# Altium PCB EmitterControllerV2.PcbDoc
Units mm, origin at the board's own origin, x right, y up, seen from the top; angles counter-clockwise.
Board outline 28.75 x 21.25 mm, 4 copper layers (Component Side, Ground Plane, Power Plane, Solder Side), stack 0.844 mm thick; 39 components, 31 nets, 138 pads, 49 vias.
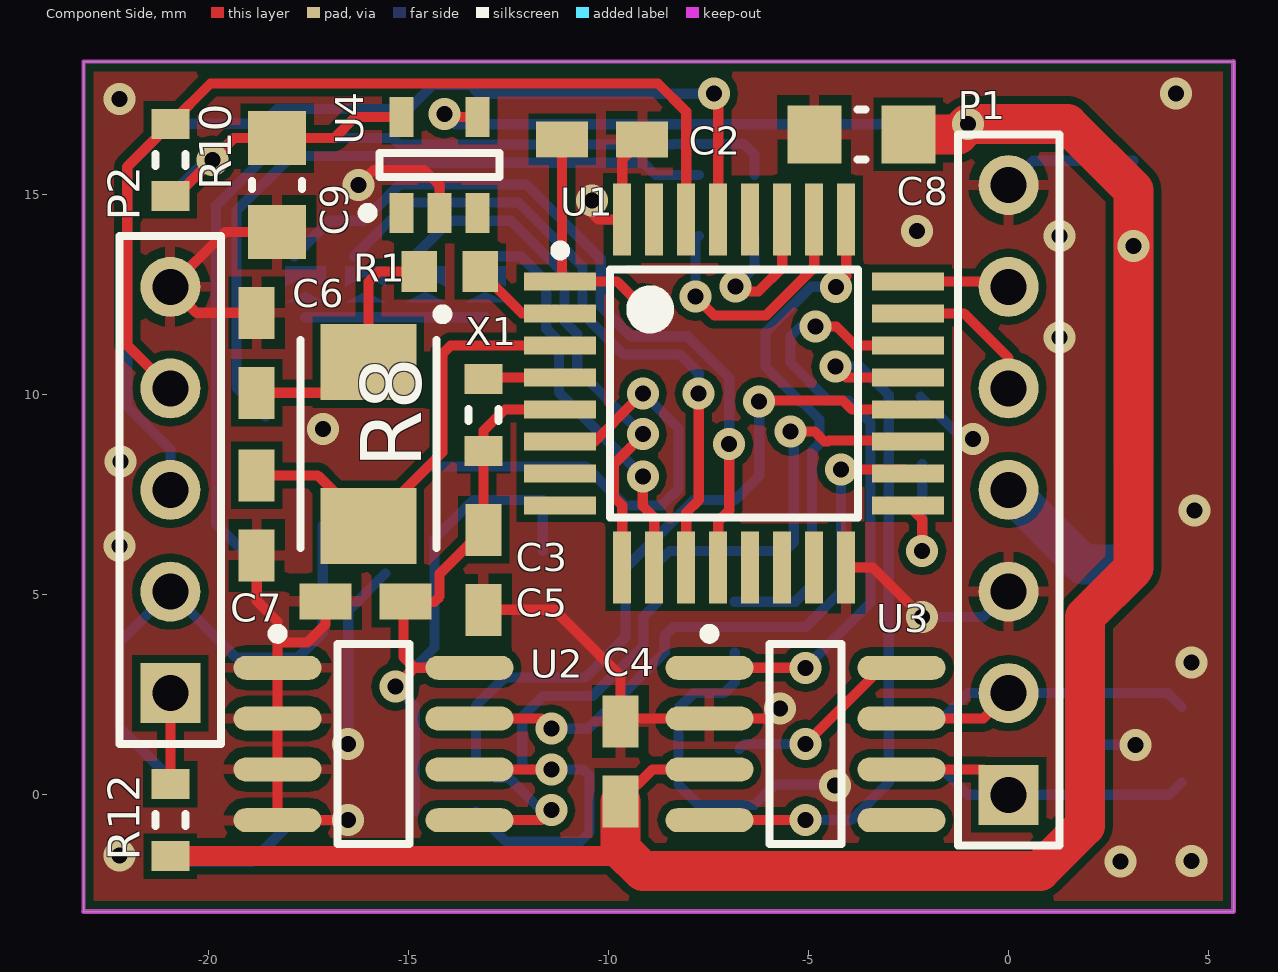
[diagram p0: Component Side view]
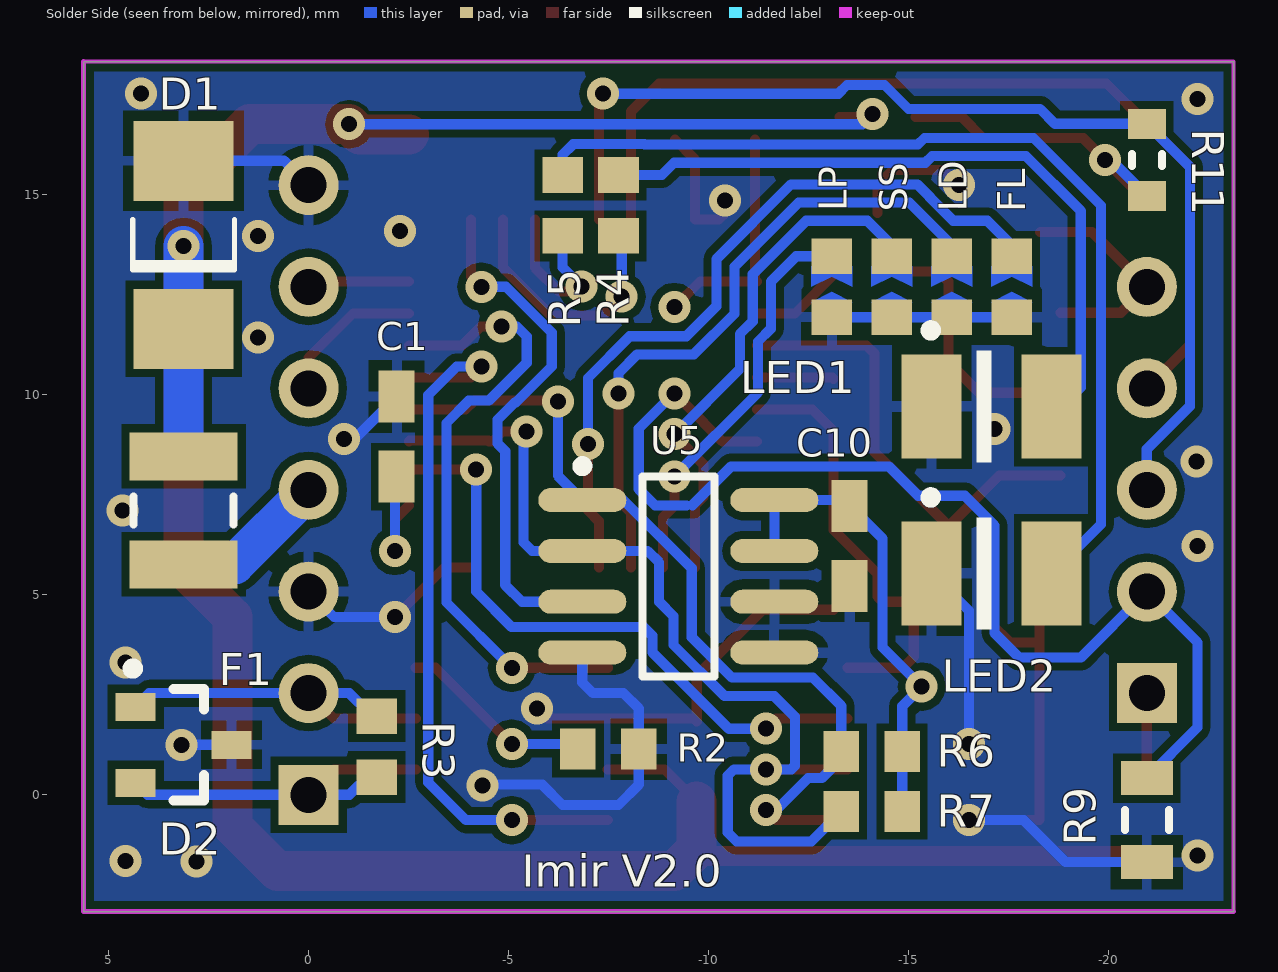
[diagram p1: Solder Side view, seen from below]
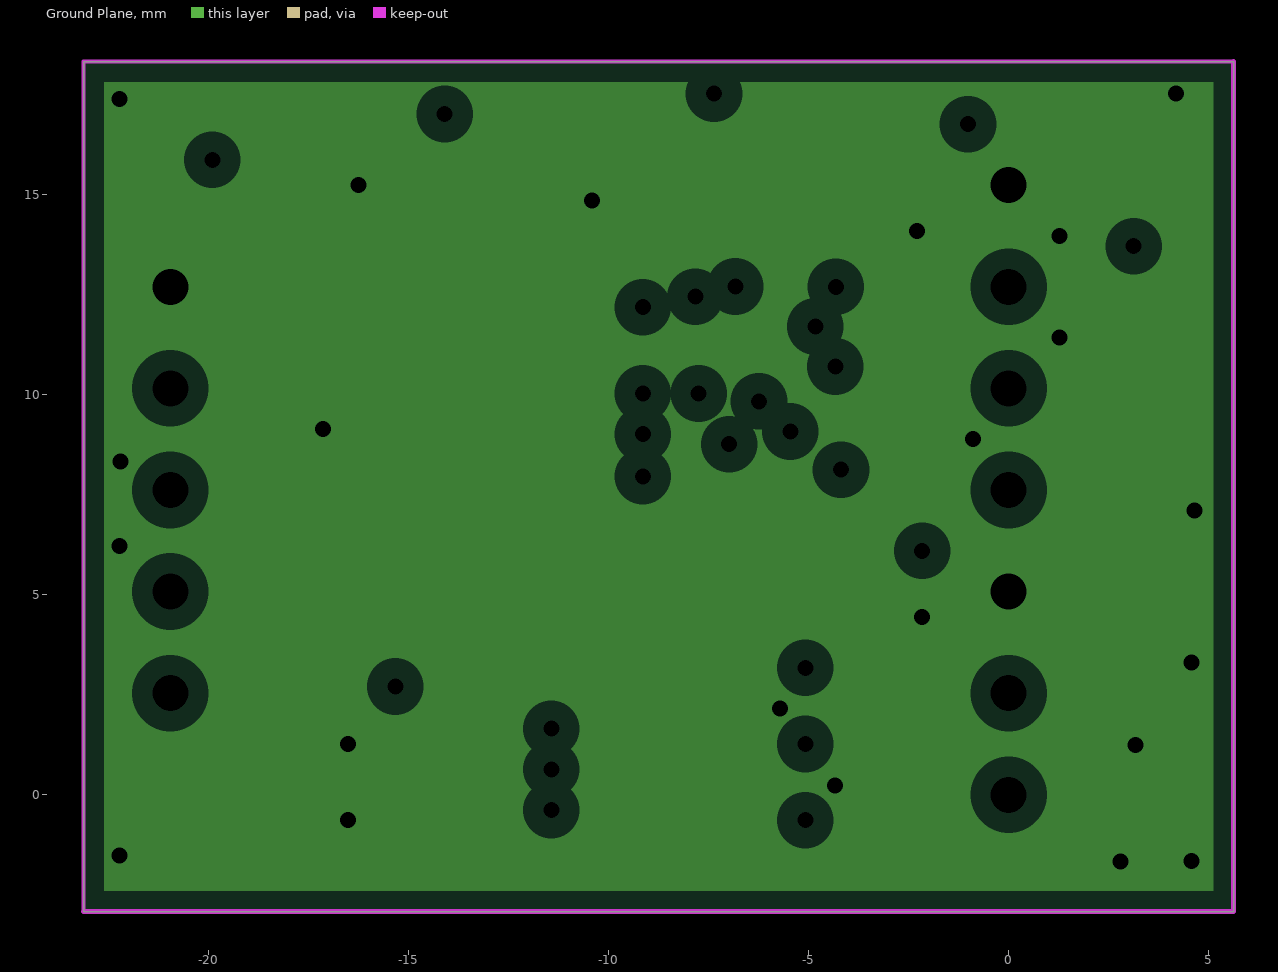
[diagram p2: Ground Plane, clearances drawn from the general rule]
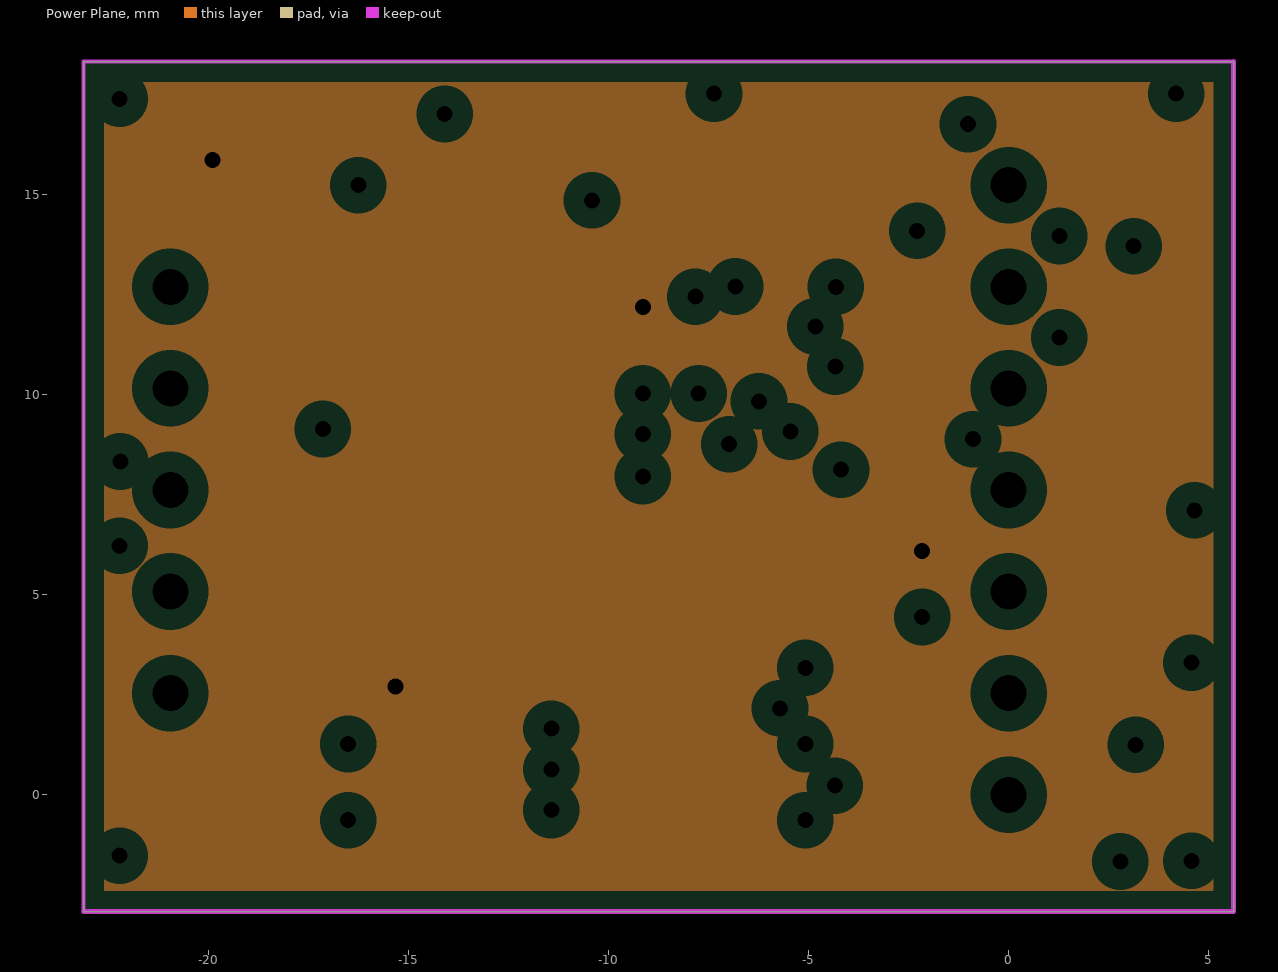
[diagram p3: Power Plane, clearances drawn from the general rule]
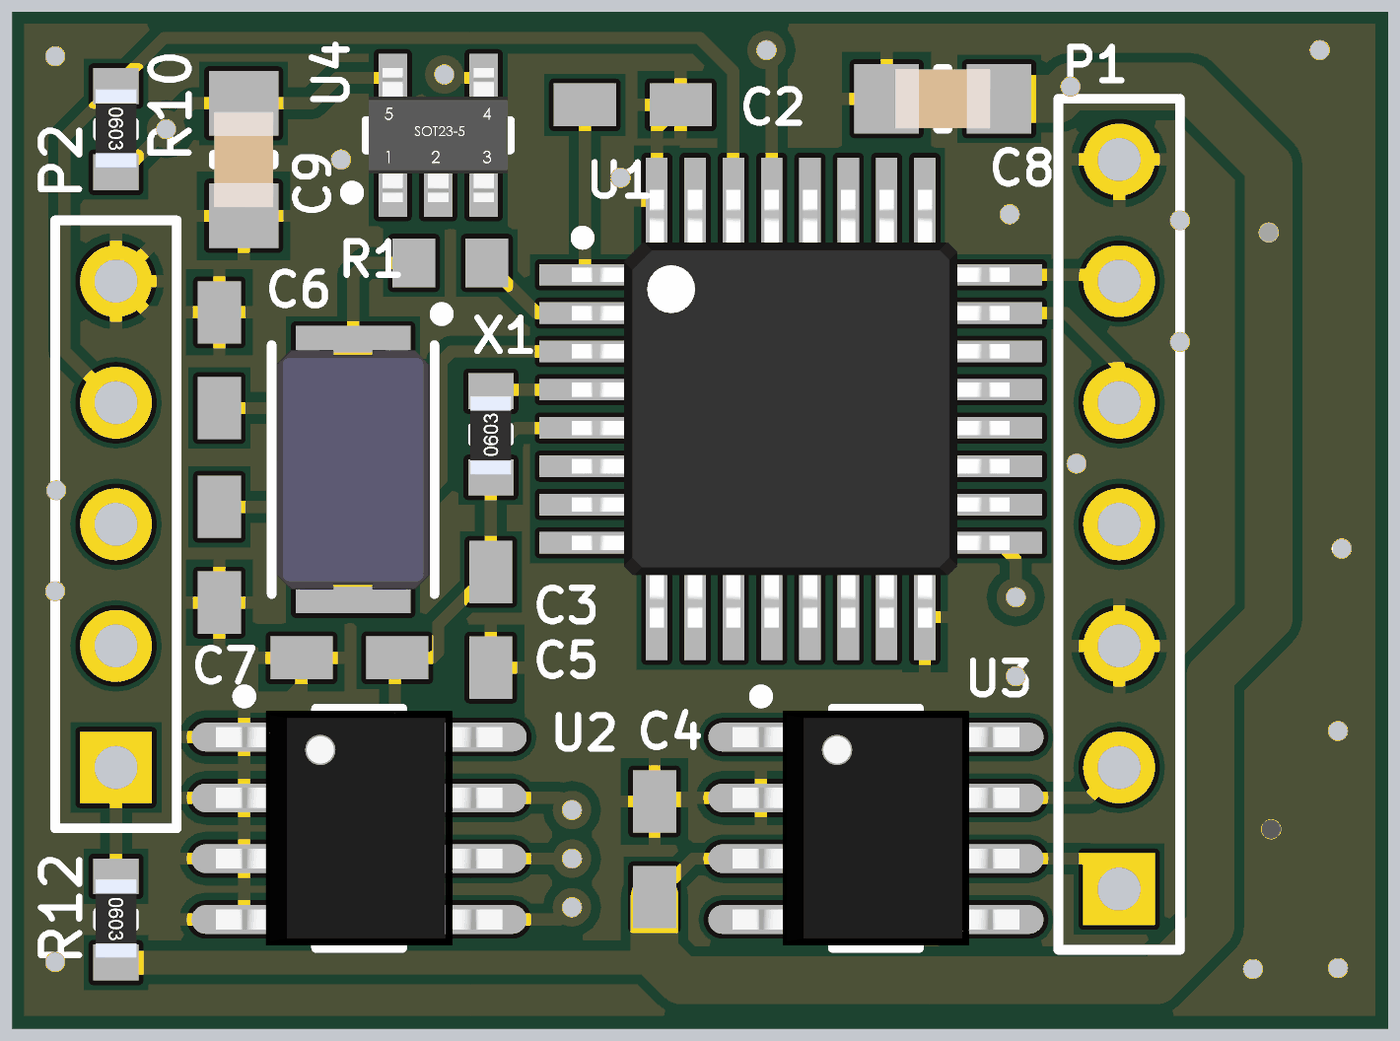
[diagram p4: 3D render of the assembled board from above, using the file's embedded part models]

## Layer stack, top to bottom
Top Solder: solder mask 0.0102, Solder Resist, Dk 3.5
Component Side: signal copper 0.0356
Dielectric 1: core 0.32, FR-4, Dk 4.8
Ground Plane: plane copper 0.036, net GND
Dielectric 3: prepreg 0.127, Dk 4.2
Power Plane: plane copper 0.036, net VCC
Dielectric 4: core 0.254, Dk 4.2
Solder Side: signal copper 0.0356
Bottom Solder: solder mask 0.0102, Solder Resist, Dk 3.5

## Board outline
-23.125,-2.92 5.625,-2.92 5.625,18.33 -23.125,18.33

## Design rules (kind name [scope] priority, off if disabled: settings)
Clearance [All] p1: gap=0.2
MinimumSolderMaskSliver [All] p1: minsoldermaskwidth=0.1
PlaneClearance [All] p1: clearance=0.508
PlaneConnect PlaneConnect_VCC [InNet('VCC') AND IsVia] p1: planeconnectstyle=Direct reliefexpansion=0.508 reliefentries=4 reliefconductorwidth=0.254 reliefairgap=0.254
PlaneConnect PlaneConnect_GND [InNet('GND') AND IsVia] p2: planeconnectstyle=Direct reliefexpansion=0.508 reliefentries=4 reliefconductorwidth=0.254 reliefairgap=0.254
PlaneConnect [All] p3: planeconnectstyle=Relief reliefexpansion=0.508 reliefentries=4 reliefconductorwidth=0.254 reliefairgap=0.254
PolygonConnect PolygonDirectConnectVia [All vs IsVia] p1: connectstyle=Direct reliefconductorwidth=0.254 reliefentries=4 polygonreliefangle="90 Angle" airgapwidth=0.254
PolygonConnect [All] p2: connectstyle=Relief reliefconductorwidth=0.254 reliefentries=4 polygonreliefangle="90 Angle" airgapwidth=0.254
RoomDefinition LaserLEDController [InComponentClass('LaserLEDController')] p1: confinementstyle=ConfineIn formatcopy=TRUE lockcomponents=FALSE outline -23.125,-2.92 5.625,-2.92 5.625,18.33 -23.125,18.33
RoutingVias [All] p1: holewidth=0.711 width=1.27 viastyle="Through Hole" minholewidth=0.4 minwidth=0.8 maxholewidth=0.711 maxwidth=1.27
SilkToSolderMaskClearance [IsPad] p1: minsilkscreentomaskgap=0 clearancetoexposedcopper=TRUE
SolderMaskExpansion [All] p1: expansion=0.102
Width [All] p1: maxlimit=1 minlimit=0.254 preferedwidth=0.254
26 further rules are at their usual default settings.

## Components (designator, comment, footprint, x,y, rotation, side; value= is the part's Value field where it differs from the comment)
C1 "ChipCap" CAP0603 -2.204,8.955 r270 bottom
C2 "ChipCap" CAP0603 -10.16,16.383 r180 top
C3 "ChipCap" CAP0603 -13.125,5.625 r90 top
C4 "ChipCap" CAP0603 -9.704,0.83 r90 top
C5 "ChipCap" CAP0603 -16.079,4.83 r0 top
C6 "ChipCap" CAP0603 -18.796,11.049 r270 top
C7 "ChipCap" CAP0603 -18.796,6.985 r90 top
C8 "ChipCap" CAP0805 -3.683,16.51 r0 top
C9 "ChipCap" CAP0805 -18.288,15.24 r90 top
C10 "ChipCap" CAP0603 -13.527,6.223 r90 bottom
D1 "SMBJ5.0CA" DO-214AS 3.125,13.75 r90 bottom
D2 "PESD5V0" SOT23 3.125,1.25 r180 bottom
F1 "Fuse" PTC1210 3.125,7.112 r270 bottom
FL "Jumper" J0603 -17.581,12.7 r90 bottom
LD "Jumper" J0603 -16.081,12.7 r90 bottom
LED1 "LED 0603" PLCC-2 -17.079,9.705 r180 bottom
LED2 "LED 0603" PLCC-2 -17.079,5.53 r180 bottom
LP "Jumper" J0603 -13.081,12.7 r90 bottom
P1 "Header 7" HDR1X7 0,0 r90 top
P2 "Header 5" HDR1X5 -20.955,2.54 r90 top
R1 "ChipRes" RES0603#1 -13.97,13.081 r180 top
R2 "ChipRes" RES0603#1 -7.493,1.143 r0 bottom
R3 "ChipRes" RES0603#1 -1.704,1.205 r270 bottom
R4 "ChipRes" RES0603#1 -7.747,14.732 r270 bottom
R5 "ChipRes" RES0603#1 -6.35,14.732 r270 bottom
R6 "ChipRes" RES0603#1 -14.079,1.08 r0 bottom
R7 "ChipRes" RES0603#1 -14.079,-0.42 r0 bottom
R8 "ChipRes" RES0603#2 -13.125,9.5 r90 top
R9 "RES0805 510R 1%" RES0805 -20.955,-0.635 r90 bottom
R10 "ChipRes" RES0603#2 -20.955,15.875 r270 top
R11 "ChipRes" RES0603#2 -20.955,15.875 r270 bottom
R12 "ChipRes" RES0603#2 -20.955,-0.635 r270 top
SS "Jumper" J0603 -14.581,12.7 r90 bottom
U1 "STM32F042K6T6" LQFP32 -6.858,10.033 r0 top
U2 "M24256" SOIC8 -15.875,1.27 r0 top
U3 "MCP2551" SOIC8 -5.08,1.27 r0 top
U4 "ST715M33R" SOT23-5 -14.224,15.748 r90 top
U5 "DS1631" SOIC8 -9.244,5.461 r180 bottom
X1 "XTAL" "ABM3 CERAMIC CRYSTAL" -16.002,8.763 r270 top

## Footprints (in the part's own frame and the unit in brackets; to place one, negate y for a bottom-side part, rotate by r counter-clockwise, add the part's x,y. Pads: shape width x height; smd on the part's side, far side on the other; paste and mask are expansions set on the pad)
"ABM3 CERAMIC CRYSTAL" [mm]
  rect 1.9x2.4 smd: 1(-2.05,0) 2(2.05,0)
  silkscreen extent -3.37,-1.7 2.6,1.97, body extent -2.5,-1.6 2.5,1.6, height 1.3
CAP0603 [mm]
  rect 1.3x0.9 smd: 1(-1,0) 2(1,0)
  body extent -1.15,-0.4 1.15,0.4, height 0.55
CAP0805 [mm]
  rect 1.35x1.45 smd: 1(-1.175,0) 2(1.175,0)
  silkscreen extent -0.1,-0.63 0.1,0.63, body extent -1,-0.62 1,0.63, height 0.3
DO-214AS [mm]
  rect 2x2.5 smd: 1(-2.1,0) 2(2.1,0)
  silkscreen extent -0.64,-1.27 0.64,1.27, body extent -2.74,-1.4 2.74,1.4, height 2.3
HDR1X5 [mm] "Connector; Header; 5 Position"
  rect 1.5x1.5 hole 0.9: 1(0,0)
  round 1.5 hole 0.9: 2(2.54,0) 3(5.08,0) 4(7.62,0) 5(10.16,0)
  silkscreen extent -1.27,-1.27 11.43,1.27
HDR1X7 [mm] "Connector; Header; 7 Position"
  rect 1.5x1.5 hole 0.9: 1(0,0)
  round 1.5 hole 0.9: 2(2.54,0) 3(5.08,0) 4(7.62,0) 5(10.16,0) 6(12.7,0) 7(15.24,0)
  silkscreen extent -1.27,-1.27 16.51,1.27
J0603 [mil]
  rect 35x40 smd: 1(-30,0) 2(30,0)
  Component Side region: 0,20 10,0 0,-20 20,-20 20,20
  Component Side region: -15,-20 -15,20 -5,0
LQFP32 [mm] "LQFP, 32-Leads, Body 7.00x7.00mm, Pitch 0.80mm, IPC Medium Density"
  rect 1.8x0.45 smd: 1(-4.35,2.8) 2(-4.35,2) 3(-4.35,1.2) 4(-4.35,0.4) 5(-4.35,-0.4) 6(-4.35,-1.2) 7(-4.35,-2) 8(-4.35,-2.8) 17(4.35,-2.8) 18(4.35,-2) 19(4.35,-1.2) 20(4.35,-0.4) 21(4.35,0.4) 22(4.35,1.2) 23(4.35,2) 24(4.35,2.8)
  rect 0.45x1.8 smd: 9(-2.8,-4.35) 10(-2,-4.35) 11(-1.2,-4.35) 12(-0.4,-4.35) 13(0.4,-4.35) 14(1.2,-4.35) 15(2,-4.35) 16(2.8,-4.35) 25(2.8,4.35) 26(2,4.35) 27(1.2,4.35) 28(0.4,4.35) 29(-0.4,4.35) 30(-1.2,4.35) 31(-2,4.35) 32(-2.8,4.35)
  silkscreen extent -4.47,-3.1 3.1,3.7, body extent -4.57,-4.57 4.57,4.57, height 1.62
PLCC-2 [mm]
  rect 1.5x2.6 smd: 1(-1.5,0) 2(1.5,0)
  silkscreen extent -1.65,-1.4 0,2.03, body extent -1.75,-1.4 1.75,1.4, height 1.91
PTC1210 [mm]
  rect 1.2x2.7 smd: 1(-1.35,0) 2(1.35,0)
  silkscreen extent -0.35,-1.25 0.35,1.25, body extent -1.6,-1.35 1.6,1.35, height 0.55
RES0603#1 [mil]
  rect 35x40 smd: 1(-30,0) 2(30,0)
RES0603#2 [mil] "Chip Resistor, 2-Leads, Body 1.60x0.85mm, IPC Medium Density"
  rect 29.53x37.4 smd: 1(-35.43,0) 2(35.43,0)
  silkscreen extent -6,-15 6,15, body extent -33,-17 31,17, height 18
RES0805 [mm] "Chip Resistor, 2-Leads, Body 2.00x1.27mm, IPC Medium Density"
  rect 0.85x1.3 smd: 1(-1.05,0) 2(1.05,0)
  silkscreen extent -0.25,-0.55 0.25,0.55, body extent -1.15,-0.67 1.15,0.68, height 0.76
SOIC8 [mm] "SOIC, 8-Leads, Body 4,90x3,90mm, Pitch 1,27mm, IPC Medium Density"
  oval 2.2x0.6 smd: 1(-2.4,1.905) 2(-2.4,0.635) 3(-2.4,-0.635) 4(-2.4,-1.905) 5(2.4,-1.905) 6(2.4,-0.635) 7(2.4,0.635) 8(2.4,1.905)
  silkscreen extent -2.52,-2.5 0.9,2.88, body extent -3,-2.45 3,2.45, height 1.61
SOT23 [mm]
  rect 1x0.7 smd: 1(-1.2,0.95) 2(-1.2,-0.95) 3(1.2,0)
  silkscreen extent -1.4,-1.4 0.51,2.03, body extent -1.25,-1.5 1.25,1.5, height 1.09
SOT23-5 [mm] "SOT23, 5-Leads, Body 2.90x2.45mm, Pitch 0.95mm, IPC Medium Density"
  rect 1x0.6 smd: 1(-1.2,0.95) 2(-1.2,0) 3(-1.2,-0.95) 4(1.2,-0.95) 5(1.2,0.95)
  silkscreen extent -1.32,-1.5 0.3,1.92, body extent -1.4,-1.45 1.4,1.45, height 1.24

## Part data
C1 C2 C3 C4 C5 C6 C7 C8 C9 C10: "Capacitor"
D1: "Transient Voltage Suppressor 600W uni-directional"
D2: "Low capacitance bidirectional double ESD protection diode"
F1: library part "Fuse PTC1812", "Fuse PTC 1812 Thermoresistor"
LED1 LED2: library part LED0603
P1: "Header, 7-Pin"
P2: "Header, 5-Pin"
R1 R2 R3 R4 R5 R6 R7 R8 R10 R11 R12: "Chip resistor"
R9: "Think Film Chip resistor"
U1: "ARM Cortex-M0 Microcontroller"
U2: "256 Kbit I2C EEPROM"
U3: library part MCP2551-I/SN, "CAN Transceiver"
U4: "High input voltage - 85 mA LDO linear regulator"
U5: "High-Precision Digital  Thermometer and Thermostat"
X1: library part "ABM3 Ceramic SMD Crystal", "Quartz crystall oscillator"

## Via types
v1: diameter 0.8, hole 0.4, Component Side to Solder Side, tented both sides, 49 vias

## Nets (pads, with @x,y where several pads share a name; then routed paths per layer and width w, separated by ;. In a path a pad name is that pad's centre, name@x,y a point inside that pad or via, vN(x,y) a via of type N, cw(c..) or ccw(c..) an arc to the next point about the centre after c; other vN are vias at no path point)
5V: C4.1 C8.2 D1.1 F1.1 R12.2 U3.3 U4.4 | length 69.6
  Component Side w0.254: v1@-13.9,16.948 U4.4 ; C4.1 -8.899,0.635 U3.3 ; C8.2@-2.889,16.51 C8.2
  Component Side w0.5: R12.2 -9.894,-1.535 -9.704,-1.345
  Component Side w1: C4.1 -9.704,-1.345 -9.144,-1.905 0.781,-1.905 1.905,-0.781 1.905,4.445 3.125,5.665 v1(3.125,13.716) 3.125,15.113 1.474,16.764 v1(-1.016,16.764) -1.27,16.51 C8.2
  Solder Side w0.254: v1(-14.097,17.018) -13.843,16.764 v1(-1.016,16.764)
  Solder Side w1: F1.1 D1.1 v1(3.125,13.716)
AIN0: P2.2 R9.2 U1.6 | length 28.4
  Component Side w0.254: U1.6 -10.344,8.833 -9.871,9.306 -9.871,9.318 -9.156,10.033 v1(-9.144,10.033)
  Solder Side w0.254: R9.2 -22.225,1.685 -22.225,3.81 P2.2 -19.304,3.429 -17.767,3.429 -17.145,4.051 -17.145,6.734 -16.404,7.475 -15.24,7.475 -14.504,8.211 -10.568,8.211 -9.596,7.239 ; -9.445,7.234 -8.663,7.234 -8.255,7.642 -8.255,9.156 -9.132,10.033 v1(-9.144,10.033)
CAN_RX: U1.21 U3.4 | length 18.1
  Component Side w0.254: U3.4 v1(-5.08,-0.635) ; v1(-4.329,10.705) -4.056,10.433 U1.21
  Solder Side w0.254: v1(-5.08,-0.635) -3.937,-0.635 -2.994,0.308 -2.994,9.995 -3.704,10.705 v1(-4.329,10.705)
CAN_TX: U1.22 U3.1 | length 15.7
  Component Side w0.254: U3.1 v1(-5.08,3.175) ; v1(-4.829,11.705) -4.301,11.705 -3.828,11.233 U1.22
  Solder Side w0.254: v1(-5.08,3.175) -3.448,4.807 -3.448,9.295 -4.006,9.853 -4.505,9.853 -5.454,10.802 -5.454,11.455 -5.204,11.705 v1(-4.829,11.705)
CANH: D2.1 P1.2 R3.1 U3.7 | length 9.1
  Component Side w0.254: U3.7 -0.635,1.905 P1.2
  Solder Side w0.254: R3.1@-1.524,2.032 -1.016,2.54 P1.2 3.985,2.54 D2.1
CANL: D2.2 P1.1 R3.2 U3.6 | length 9.1
  Component Side w0.254: U3.6 -0.635,0.635 P1.1
  Solder Side w0.254: R3.2@-1.524,0.508 -1.016,0 P1.1 4.025,0 D2.2
GND: C1.1 C2.1 C3.1 C4.2 C5.1 C6.1 C7.1 C8.1 C9.1 C10.1 D1.2 D2.3 FL.1 LD.1 LED1.1 LED2.1 LP.1 P1.3 P1.7 P2.5 R2.1 R9.1 SS.1 U1.16 U1.32 U2.1 U2.2 U2.3 U2.4 U3.2 U4.2 U5.4 U5.5 U5.6 | length 65.9
  Component Side w0.254: C7.1 -18.796,4.852 -18.275,4.331 -18.275,3.81 ; C6.1 -20.304,12.049 P2.5 -19.59,14.065 C9.1 ; C5.1 -17.079,4.257 -17.526,3.81 -18.275,3.81 ; v1(-16.51,-0.635) U2.4 U2.3 U2.2 U2.1 -18.275,3.81 ; v1(-16.256,15.24) -15.875,15.621 -14.605,15.621 -14.224,15.24 U4.2 ; C3.1 -11.356,4.625 -9.704,2.973 C4.2 -9.629,1.905 U3.2 -5.969,1.905 v1(-5.715,2.159) ; v1(-10.414,14.859) -10.414,14.542 -10.255,14.383 U1.32 -9.658,15.885 C2.1 ; v1(-4.345,0.227) v1@-4.318,0.254 ; U1.16 -3.397,5.683 v1(-2.159,4.445)
  Solder Side w0.254: R9.1 -18.931,-1.685 -17.881,-0.635 v1(-16.51,-0.635) ; FL.1 LD.1 SS.1 LP.1 ; v1(-16.51,1.27) -16.51,4.599 LED2.1 ; U5.4 -6.844,2.808 -7.112,2.54 -7.874,2.54 -8.255,2.159 R2.1 -8.255,0.254 -7.747,-0.254 -6.35,-0.254 -5.842,0.254 -4.372,0.254 v1(-4.345,0.227) ; C1.1 -1.139,8.89 v1(-0.889,8.89) ; v1(-2.159,4.445) -0.635,4.445 P1.3 ; P1.7 0.61,15.85 D1.2 ; D2.3 v1(3.175,1.25)
  other v1: 2.796,-1.67 4.572,-1.651 -22.225,-1.524 4.572,3.302 -22.225,6.223 4.649,7.112 -22.204,8.33 -17.145,9.144 1.27,11.43 1.27,13.97 -2.286,14.097 -22.225,17.399 4.191,17.526
I2C1_SCL: R7.2 U1.19 U2.6 U5.2 | length 25.2
  Component Side w0.254: U2.6 v1(-11.43,0.635) ; v1(-5.454,9.08) -4.85,9.08 -4.602,8.833 -4.514,8.833 -4.492,8.855 -2.53,8.855 U1.19
  Solder Side w0.254: R7.2 -12.567,-1.17 -10.704,-1.17 -10.479,-0.945 -10.479,0.48 -10.634,0.635 v1(-11.43,0.635) -12.065,0.635 -12.157,0.727 -12.157,1.952 -11.642,2.467 -10.404,2.467 -9.125,3.746 -9.125,4.464 -8.763,4.826 -8.763,5.81 -8.477,6.096 U5.2 -5.588,6.096 -5.372,6.312 -5.372,8.999 v1(-5.454,9.08)
I2C1_SDA: R6.2 U1.20 U2.5 U5.1 | length 22.1
  Component Side w0.254: U2.5 -11.684,-0.635 v1(-11.43,-0.381) ; v1(-6.238,9.836) -6.22,9.853 -4.138,9.853 -3.918,9.633 U1.20
  Solder Side w0.254: v1(-11.43,-0.381) -11.691,-0.381 -12.487,0.415 -12.829,0.415 -13.317,0.903 R6.2 -13.317,2.223 -12.611,2.929 -10.584,2.929 -9.579,3.934 -9.579,5.661 -7.874,7.366 U5.1 -6.232,7.978 -6.232,9.83 v1(-6.238,9.836)
J_FL: FL.2 U1.12 | length 19.2
  Component Side w0.254: U1.12 -7.258,6.839 -6.985,7.112 v1(-6.985,8.763)
  Solder Side w0.254: FL.2@-17.859,13.462 -16.97,14.351 -16.117,14.351 -15.529,14.939 -15.529,14.951 -15.221,15.259 -12.063,15.259 -10.195,13.391 -10.195,12.215 -9.445,11.465 -8.029,11.465 -6.985,10.421 v1(-6.985,8.763)
J_LD: LD.2 U1.11 | length 16.6
  Component Side w0.254: U1.11 -8.058,7.055 -7.747,7.366 v1(-7.747,10.033)
  Solder Side w0.254: LD.2@-16.359,13.462 -15.016,14.805 -12.251,14.805 -10.649,13.203 -10.649,12.027 -9.633,11.011 -8.217,11.011 -7.747,10.541 v1(-7.747,10.033)
J_LP: LP.2 U1.10 | length 10.7
  Component Side w0.254: v1(-9.144,7.961) -9.144,7.219 -8.858,6.933 U1.10
  Solder Side w0.254: LP.2@-13.359,13.462 -12.192,13.462 -11.557,12.827 -11.557,11.651 -11.237,11.331 -11.237,10.054 v1(-9.144,7.961) -9.144,7.759 -9.156,7.747 v1@-9.257,7.848
J_SS: SS.2 U1.9 | length 13.2
  Component Side w0.254: U1.9 -9.658,7.233 -9.871,7.446 -9.871,8.262 -9.144,8.989 v1(-9.144,9.017)
  Solder Side w0.254: SS.2@-14.859,13.462 -13.97,14.351 -12.439,14.351 -11.103,13.015 -11.103,11.839 -10.783,11.519 -10.783,10.644 -9.156,9.017 v1(-9.144,9.017)
NetC6_2: C6.2 R1.2 X1.1 | length 6.5
  Component Side w0.254: C6.2 -16.766,10.049 X1.1 -16.002,12.827 -15.748,13.081 R1.2
NetC7_2: C7.2 U1.3 X1.2 | length 11.5
  Component Side w0.254: C7.2 -17.274,7.985 X1.2 -14.152,8.563 -14.152,11.025 -13.944,11.233 U1.3 U1.3@-11.24,11.201
NetF1_2: F1.2 P1.4 | length 3.9
  Solder Side w1: P1.4 1.858,5.762 F1.2
NetLED1_2: LED1.2 R4.1 | length 17.8
  Solder Side w0.254: LED1.2@-18.579,9.455 -19.304,10.18 -19.304,14.598 -17.935,15.967 -15.586,15.967 -15.421,15.802 -9.136,15.802 -8.828,15.494 R4.1
NetLED2_2: LED2.2 R5.1 | length 24.6
  Solder Side w0.254: LED2.2 -19.812,6.763 -19.812,14.732 -18.123,16.421 -15.398,16.421 -15.233,16.256 -8.4,16.256 -8.39,16.265 -6.613,16.265 -6.35,16.002 R5.1
NetR1_1: R1.1 U1.2 | length 2.4
  Component Side w0.254: R1.1 -12.16,12.033 U1.2
NetR2_2: R2.2 U3.8 | length 4.9
  Component Side w0.254: v1(-5.08,1.27) -3.175,3.175 U3.8
  Solder Side w0.254: R2.2 -6.604,1.27 v1(-5.08,1.27)
NetR4_2: R4.2 U1.26 | length 6.4
  Component Side w0.254: v1(-7.829,12.455) -7.352,11.978 -6.068,11.978 -4.858,13.188 U1.26
  Solder Side w0.254: v1(-7.829,12.455) -7.829,13.888 R4.2
NetR5_2: R5.2 U1.27 | length 4.2
  Component Side w0.254: v1(-6.829,12.705) -6.829,12.58 -6.257,12.58 -5.658,13.179 U1.27
  Solder Side w0.254: v1@-6.829,12.706 -6.35,13.185 R5.2
NetU1_18: U1.18 U2.7 | length 15.8
  Component Side w0.254: U2.7 -11.684,1.905 v1(-11.43,1.651) ; v1(-4.191,8.128) -2.603,8.128 U1.18
  Solder Side w0.254: v1(-11.43,1.651) -10.508,1.651 -8.595,3.564 -8.595,3.978 -8.382,4.191 -5.08,4.191 -4.191,5.08 v1(-4.191,8.128)
NRESET: R8.2 U1.4 | length 1.9
  Component Side w0.254: R8.2 -13.092,10.433 U1.4
SWDCLK: P1.6 U1.24 | length 2.6
  Component Side w0.254: U1.24 -0.133,12.833 P1.6
SWDIO: P1.5 U1.23 | length 3.7
  Component Side w0.254: U1.23 -1.111,12.033 0,10.922 P1.5
TOUT: U1.25 U5.3 | length 13.1
  Component Side w0.254: v1(-4.318,12.7) -4.058,12.96 U1.25
  Solder Side w0.254: U5.3 -5.334,4.826 -4.918,5.242 -4.918,8.588 -4.727,8.779 -4.727,9.381 -5.153,9.807 -5.181,9.807 -6.079,10.705 -6.079,11.556 -4.935,12.7 v1(-4.318,12.7)
USART1_RX: P2.4 R10.1 U1.30 | length 23.8
  Component Side w0.254: P2.4 -22.032,11.237 -22.032,15.698 R10.1 -19.95,17.78 -8.763,17.78 -8.058,17.075 U1.30
USART1_TX: P2.3 R11.1 U1.29 | length 27.3
  Component Side w0.254: v1(-7.366,17.526) -7.239,17.399 -7.258,17.38 U1.29
  Solder Side w0.254: P2.3 -20.955,8.637 -22.032,9.714 -22.032,15.698 R11.1 -18.658,16.775 -18.288,17.145 -14.998,17.145 -14.398,17.745 -13.462,17.745 -13.243,17.526 v1(-7.366,17.526)
VCC: C1.2 C2.2 C3.2 C5.2 C9.2 C10.2 R6.1 R7.1 R8.1 R10.2 R11.2 U1.1 U1.5 U1.17 U2.8 U4.5 U5.7 U5.8 | length 40.5
  Component Side w0.254: R10.2 -20.807,14.975 v1(-19.907,15.875) -19.367,16.415 C9.2 -16.859,16.415 -16.326,16.948 U4.5 ; v1(-15.329,2.705) -14.859,3.175 ; U2.8 -14.859,3.175 ; U1.5 -12.592,9.633 -13.125,9.1 R8.1 C3.2 -14.224,5.526 -14.224,4.953 -14.351,4.826 -15.129,4.826 -15.129,3.445 -14.859,3.175 ; C2.2 -11.16,12.881 U1.1 -9.785,12.833 v1(-9.144,12.192) ; U1.17 -2.159,6.884 v1(-2.159,6.096)
  Solder Side w0.254: R11.2 -20.055,15.875 v1(-19.907,15.875) ; R7.1 R6.1 -14.841,2.217 v1(-15.329,2.705) -14.351,3.683 -14.351,6.399 C10.2 -13.384,7.366 U5.8 U5.7 ; C1.2 -2.159,7.91 v1(-2.159,6.096) ; C1.2@-2.159,8.144 C1.2@-2.159,8.271
VSENS: P2.1 R12.1 | length 2.3
  Component Side w0.254: R12.1 P2.1
pads on no net: U1.7 U1.8 U1.13 U1.14 U1.15 U1.28 U1.31 U3.5 U4.1 U4.3

## Polygon pours and split planes (outlines as drawn)
GND on Component Side "Pol_GND" (solid, pour order 1): -23.125,-2.92 5.625,-2.92 5.625,18.33 -23.125,18.33
GND on Solder Side "Pol_GND" (solid, remove dead copper, pour order 0): -23.125,-2.92 5.625,-2.92 5.625,18.33 -23.125,18.33
GND on Ground Plane (split plane): 5.115,-2.41 -22.615,-2.41 -22.615,17.82 5.115,17.82
VCC on Power Plane (split plane): 5.115,-2.41 -22.615,-2.41 -22.615,17.82 5.115,17.82

## Keep-outs
Keep-Out Layer:
  the board outline again, w0.127

## Silkscreen, mask and mechanical layers (free items; w line width, h text height)
Bottom Overlay:
  text "Imir V2.0" at -5.329,-2.295 h0.8
Mechanical 13:
  the board outline again, w0.1
Mechanical 14:
  the board outline again, w0.1
  text "Imir V1.0 R2.0" at -5.329,-2.295 h0.8

## Dimensions
5.625,18.33 to 5.625,-2.92 on Keep-Out Layer
-23.125,18.33 to 5.625,18.33 on Keep-Out Layer

## Text inside footprints (layer, text, board x,y; h text height)
U1: Mechanical 13 "1" at -12.204,12.455 h0.8
U2: Mechanical 13 "1" at -19.685,2.794 h0.8
U3: Mechanical 13 "1" at -8.89,2.794 h0.8
U4: Mechanical 13 "1" at -15.954,13.955 h0.6
U5: Mechanical 14 "1" at -5.434,6.985 h0.8